# Altium PCB LED_TRIANGEL.PcbDoc
Units mil, origin at the board's own origin, x right, y up, seen from the top; angles counter-clockwise.
Board outline 1500 x 390 mil, 2 copper layers (Top Layer, Bottom Layer), stack 61.855 mil thick; 7 components, 8 nets, 40 pads, 34 vias.
Unrouted connection lines stored in the file: 2.
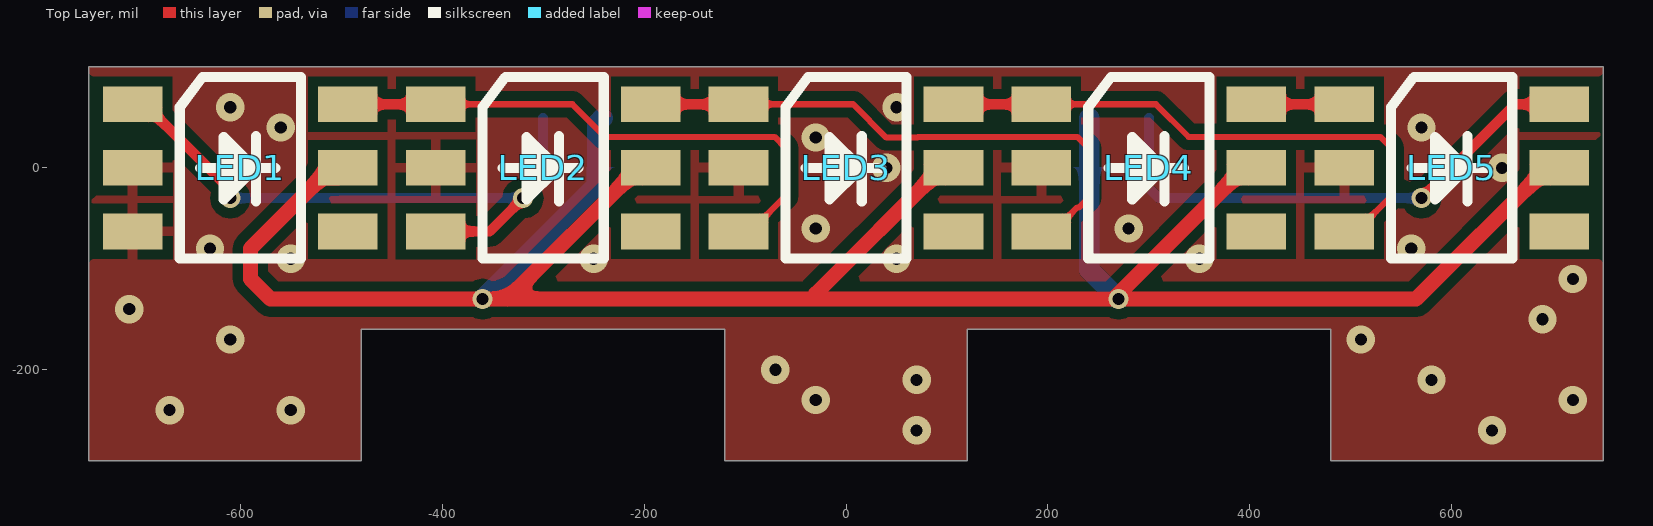
[diagram p0: Top Layer view]
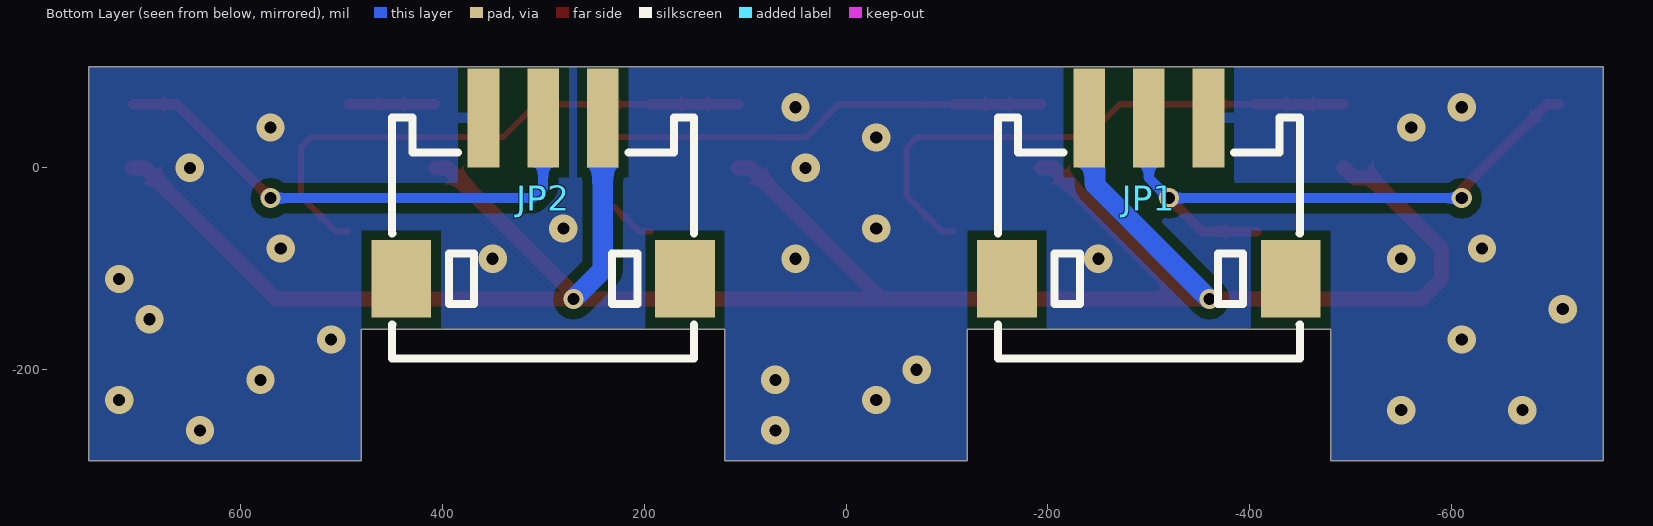
[diagram p1: Bottom Layer view, seen from below]
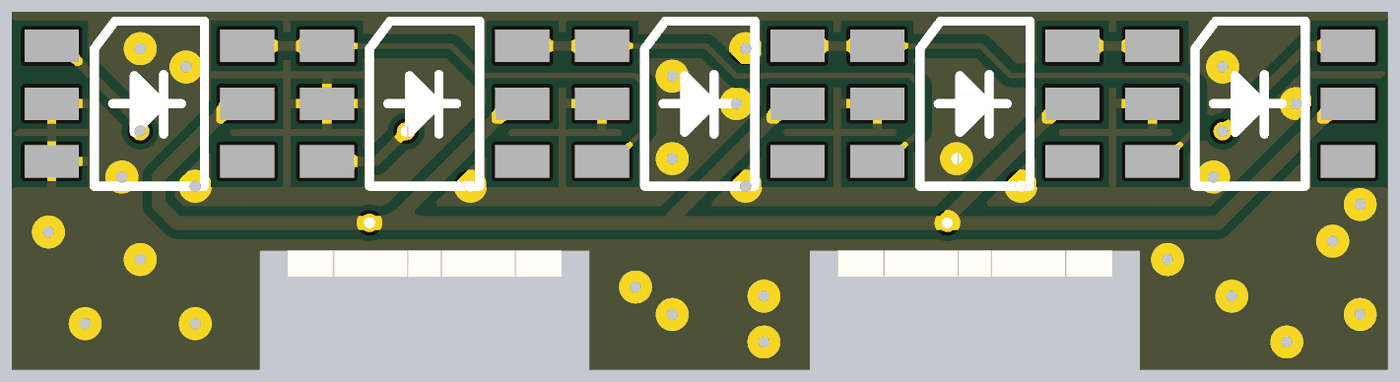
[diagram p2: 3D render of the assembled board from above, using the file's embedded part models]

## Layer stack, top to bottom
Top Solder: solder mask 0.4, Solder Resist, Dk 3.5
Top Layer: signal copper 1.4
Dielectric 1: dielectric 59.0551, FR-4, Dk 4.8
Bottom Layer: signal copper 1.4
Bottom Solder: solder mask 0.4, Solder Resist, Dk 3.5

## Board outline
-750,-290 -750,100 750,100 750,-290 480,-290 480,-160 120,-160 120,-290 -120,-290 -120,-160 -480,-160 -480,-290

## Design rules (kind name [scope] priority, off if disabled: settings)
Clearance [All] p1: gap=10 ignorepadtopadclearanceinfootprint=FALSE except(0: Arc-Hole Track-Hole SMDPad-Hole THPad-Hole Via-Hole Fill-Hole Poly-Hole Region-Hole Text-Hole)
PlaneConnect [All] p1: pad.planeconnectstyle=Relief pad.reliefexpansion=20 pad.reliefentries=4 pad.reliefconductorwidth=10 pad.reliefairgap=10 via.planeconnectstyle=Direct via.reliefexpansion=20 via.reliefentries=4 via.reliefconductorwidth=10 via.reliefairgap=10
PolygonConnect [All] p1: thpad.connectstyle=Relief thpad.reliefconductorwidth=10 thpad.reliefentries=4 thpad.polygonreliefangle="90 Angle" thpad.airgapwidth=10 smdpad.connectstyle=Relief smdpad.reliefconductorwidth=10 smdpad.reliefentries=4 smdpad.polygonreliefangle="90 Angle" smdpad.airgapwidth=10 via.connectstyle=Direct via.reliefconductorwidth=10 via.reliefentries=4 via.polygonreliefangle="90 Angle" via.airgapwidth=10
RoutingVias [All] p1: holewidth=12 width=20 viastyle="Through Hole" minholewidth=12 minwidth=20 maxholewidth=25 maxwidth=50
SolderMaskExpansion [All] p1: expansion=4
Width [All] p1: maxlimit=100 minlimit=6 preferedwidth=10
29 further rules are at their usual default settings.

## Components (designator, comment, footprint, x,y, rotation, side; value= is the part's Value field where it differs from the comment)
JP1 "HDR-1X3" ZH1.5-WS-3P -300,-110 r180 bottom
JP2 "HDR-1X3" ZH1.5-WS-3P 300,-110 r180 bottom
LED1 "LED-WS2815" "LED 5050" -600,0 r0 top
LED2 "LED-WS2815" "LED 5050" -300,0 r0 top
LED3 "LED-WS2815" "LED 5050" 0,0 r0 top
LED4 "LED-WS2815" "LED 5050" 300,0 r0 top
LED5 "LED-WS2815" "LED 5050" 600,0 r0 top

## Footprints (in the part's own frame and the unit in brackets; to place one, negate y for a bottom-side part, rotate by r counter-clockwise, add the part's x,y. Pads: shape width x height; smd on the part's side, far side on the other; paste and mask are expansions set on the pad)
"LED 5050" [mm] "白色5050LED"
  rect 1.5x0.9 smd: 1(-2.705,1.6) 2(2.705,1.6) 3(-2.705,0) 4(2.705,0) 5(-2.705,-1.6) 6(2.705,-1.6)
  silkscreen extent -1.52,-2.29 1.52,2.29, body extent -2.7,-2.5 2.7,2.5, height 1.65
ZH1.5-WS-3P [mm] "长：7.6mm，宽：6.0mm，高：3.7mm"
  rect 1.5x1.95 smd: 0(-3.568,0) 0(3.568,0)
  rect 0.8x2.5 smd: 1(-1.5,4.05) 2(0,4.05) 3(1.5,4.05)
  silkscreen extent -3.8,-2 3.8,4.06, body extent -3.8,-2 3.8,4.6, height 3.75

## Part data
JP1 JP2: library part "Header 3", "3P接插件", BOM名称=3P接, 学习资源=www.ooocke.
LED1 LED2 LED3 LED4 LED5: "三基色LED"
  LED1 LED2 LED3: BOM名称=Èý»ùÉ, 学习资源=www.ooocke.
  LED4 LED5: BOM名称=三基色LED, 学习资源=www.ooocke.com, 版权归属=源创客

## Via types
v1: diameter 28, hole 12, Top Layer to Bottom Layer, 29 vias
v2: diameter 20, hole 12, Top Layer to Bottom Layer, 5 vias

## Nets (pads, with @x,y where several pads share a name; then routed paths per layer and width w, separated by ;. In a path a pad name is that pad's centre, name@x,y a point inside that pad or via, vN(x,y) a via of type N, cw(c..) or ccw(c..) an arc to the next point about the centre after c; other vN are vias at no path point)
+12: JP1.1 JP2.3 LED1.4 LED2.4 LED3.4 LED4.4 LED5.4 | length 2522.2
  Top Layer w15: LED1.4 -503.72,-10.22 -520.22,-10.22 -590,-80 -590,-110 -570,-130 v2(-360,-130) -335.31,-130 ; LED2.4 -205.31,0 -335.31,-130 ; LED3.4 94.69,0 -30,-124.69 -30,-130 ; LED4.4 394.69,0 267.34,-127.34 v2@267.34,-130 ; LED5.4 694.69,0 564.69,-130 v2(270,-130) v2@267.34,-130 ; -335.31,-130 -30,-130 ; -30,-130 v2@267.34,-130
  Bottom Layer w20: v2(-360,-130) -246.69,-16.69 -246.69,43.7 JP1.1 ; JP2.3 240.94,-100.94 v2(270,-130)
LGND: JP1.3 JP2.1 LED1.3 LED1.5 LED2.3 LED3.3 LED4.3 LED5.3
  other v1: 70,-260 640,-260 -670,-240 -550,-240 -30,-230 720,-230 70,-210 580,-210 -70,-200 -610,-170 510,-170 690,-150 -710,-140 720,-110 -550,-90 -250,-90 50,-90 350,-90 -630,-80 560,-80 -30,-60 280,-60 40,0 650,0 -30,30 -560,40 570,40 -610,60 50,60
NetJP1_2: JP1.2 LED1.1 LED2.5 | length 617.8
  Top Layer w10: LED1.1 -694.69,63 -610,-21.69 v2(-610,-30) ; LED2.5 -353,-63 v2(-320,-30)
  Bottom Layer w10: v2(-610,-30) v2(-320,-30) -300,-10 JP1.2
NetJP2_2: JP2.2 LED5.2 | length 518.6
  Top Layer w10: v2(570,-30) 663,63 LED5.2
  Bottom Layer w10: JP2.2 300,-20 310,-30 v2(570,-30)
NetLED1_2: LED1.2 LED2.1 LED3.5 | length 560.5
  Top Layer w6: LED2.1 -271.13,63 -238.84,30.72 -70.72,30.72 -60,20 -60,-28.31 -94.69,-63 LED3.5
  Top Layer w10: LED1.2 LED2.1
NetLED2_2: LED2.2 LED3.1 LED4.5 | length 562.1
  Top Layer w6: LED3.1 7,63 40,30 70.87,30 71.59,30.72 229.28,30.72 240,20 240,-30 230.86,-39.14 229.17,-39.14 205.31,-63 LED4.5
  Top Layer w10: LED2.2 LED3.1
NetLED3_2: LED3.2 LED4.1 LED5.5 | length 560.5
  Top Layer w6: LED4.1 307,63 339.28,30.72 529.28,30.72 540,20 540,-28.31 505.31,-63 LED5.5
  Top Layer w10: LED3.2 LED4.1
NetLED4_2: LED4.2 LED5.1 | length 87
  Top Layer w10: LED4.2 LED5.1
pads on no net: JP1.0 JP2.0 LED1.6 LED2.6 LED3.6 LED4.6 LED5.6

## Polygon pours and split planes (outlines as drawn)
LGND on Bottom Layer "LGND_L02_P003" (solid, remove dead copper, pour order 3): -750,-290 -750,100 750,100 750,-290 480,-290 480,-160 120,-160 120,-290 -120,-290 -120,-160 -480,-160 -480,-290
LGND on Top Layer "LGND_L01_P002" (solid, remove dead copper, pour order 2): -750,-290 -750,100 750,100 750,-290 480,-290 480,-160 120,-160 120,-290 -120,-290 -120,-160 -480,-160 -480,-290

## Silkscreen, mask and mechanical layers (free items; w line width, h text height)
Mechanical 1:
  the board outline again, w10